# EAGLE board Rotall Encoder ver1.0 (EAGLE 9.6.0)
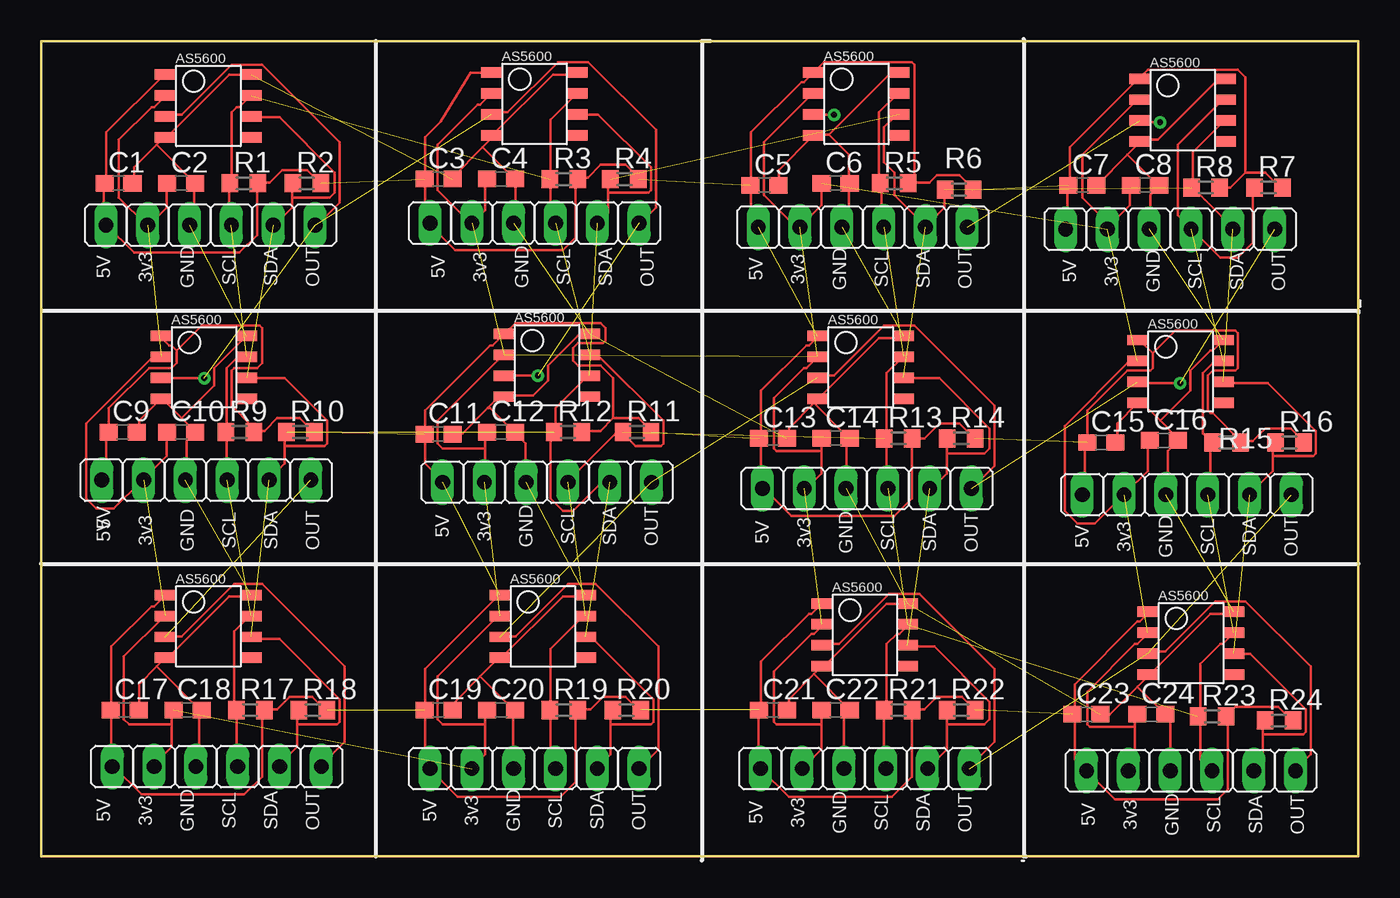
[diagram p0: board, top side]
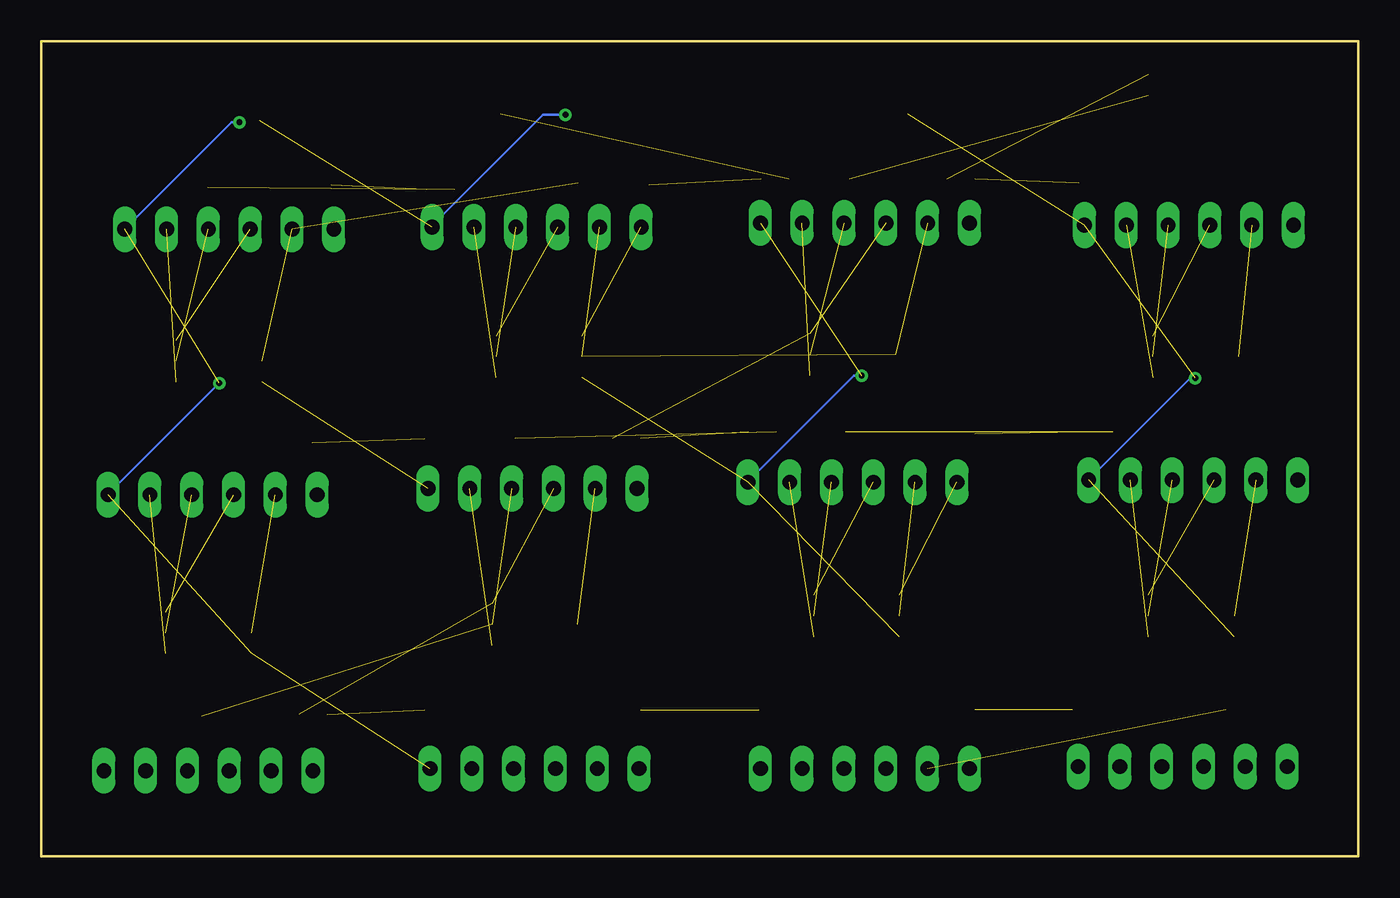
[diagram p1: board, bottom side, seen from below]

Size 80.01 x 49.53 mm. Coordinates in mm from the lower left corner, seen from the top.
Outline: 80.01,0 0,0 0,49.53 80.01,49.53 80.01,0
Copper layers (1*16): Top 0.035mm / dielectric 1.5mm / Bottom 0.035mm
Design rules "default": minimum track width 6mil, minimum drill 0.35mm, track to track 6mil, track to pad 6mil, pad to pad 6mil, via to via 6mil, smd to smd 6mil, copper to edge 40mil, drill to drill 6mil, minimum pad ring 10mil, minimum via ring 8mil, stop-mask expansion 4mil, vias tented up to drill 0mil, thermal gap 10mil
tRestrict: 11 lines
bRestrict: 7 lines
vRestrict: 5 lines

## Footprints (pad centres in the part's own frame; a part is rotated, then mirrored left to right if it is on the bottom)
C0603 = smd 1.1 x 1: 1 -0.85,0; 2 0.85,0
06X01 = drill 0.9 long: 1 6.35,0; 2 3.81,0; 3 1.27,0; 4 -1.27,0; 5 -3.81,0; 6 -6.35,0
R0603 = smd 1 x 1.1: 1 -0.85,0; 2 0.85,0
AS5600 = smd 1.27 x 0.635: DIR 2.585,1.905; GND -2.615,-1.905; OUT -2.615,-0.635; PGO 2.585,-1.905; SCL 2.585,0.635; SDA 2.585,-0.635; VDD3V3 -2.615,0.635; VDD5V -2.615,1.905

## Placement (x,y rotation side)
C1  [C0603]  4.7,40.89 0 top
C2  [C0603]  8.51,40.89 0 top
C3  [C0603]  24.13,41.15 0 top
C4  [C0603]  27.94,41.15 0 top
C5  [C0603]  43.94,40.77 0 top
C6  [C0603]  48.26,40.89 0 top
C7  [C0603]  63.25,40.77 0 top
C8  [C0603]  67.06,40.77 0 top
C9  [C0603]  4.95,25.78 0 top
C10  [C0603]  8.51,25.78 0 top
C11  [C0603]  24.13,25.65 0 top
C12  [C0603]  27.94,25.78 0 top
C13  [C0603]  44.45,25.4 0 top
C14  [C0603]  48.26,25.4 0 top
C15  [C0603]  64.39,25.15 0 top
C16  [C0603]  68.2,25.27 0 top
C17  [C0603]  5.08,8.89 0 top
C18  [C0603]  8.89,8.89 0 top
C19  [C0603]  24.13,8.89 0 top
C20  [C0603]  27.94,8.89 0 top
C21  [C0603]  44.45,8.89 0 top
C22  [C0603]  48.26,8.89 0 top
C23  [C0603]  63.5,8.64 0 top
C24  [C0603]  67.44,8.64 0 top
JP1  06X01  [06X01]  29.97,38.48 180 top
JP2  06X01  [06X01]  49.91,38.23 180 top
JP3  06X01  [06X01]  10.29,38.35 180 top
JP4  06X01  [06X01]  68.58,38.1 180 top
JP5  06X01  [06X01]  10.03,22.86 180 top
JP6  06X01  [06X01]  30.73,22.73 180 top
JP7  06X01  [06X01]  50.16,22.35 180 top
JP8  06X01  [06X01]  69.6,21.97 180 top
JP9  06X01  [06X01]  10.67,5.46 180 top
JP10  06X01  [06X01]  29.97,5.33 180 top
JP11  06X01  [06X01]  50.04,5.33 180 top
JP12  06X01  [06X01]  69.85,5.21 180 top
R1  [R0603]  12.32,40.89 0 top
R2  [R0603]  16.13,40.89 0 top
R3  [R0603]  31.75,41.15 0 top
R4  [R0603]  35.43,41.15 0 top
R5  [R0603]  51.82,40.89 0 top
R6  [R0603]  55.75,40.51 0 top
R7  [R0603]  74.55,40.64 0 top
R8  [R0603]  70.74,40.64 0 top
R9  [R0603]  12.07,25.78 0 top
R10  [R0603]  15.75,25.78 0 top
R11  [R0603]  36.2,25.78 0 top
R12  [R0603]  32,25.78 0 top
R13  [R0603]  52.07,25.4 0 top
R14  [R0603]  55.88,25.4 0 top
R15  [R0603]  72.01,25.15 0 top
R16  [R0603]  75.82,25.15 0 top
R17  [R0603]  12.7,8.89 0 top
R18  [R0603]  16.51,8.89 0 top
R19  [R0603]  31.75,8.89 0 top
R20  [R0603]  35.56,8.89 0 top
R21  [R0603]  52.07,8.89 0 top
R22  [R0603]  55.88,8.89 0 top
R23  [R0603]  71.12,8.51 0 top
R24  [R0603]  75.18,8.25 0 top
U1  AS5600  [AS5600]  10.16,45.59 0 top
U2  AS5600  [AS5600]  29.97,45.72 0 top
U3  AS5600  [AS5600]  49.53,45.72 0 top
U4  AS5600  [AS5600]  69.34,45.34 0 top
U5  AS5600  [AS5600]  9.91,29.72 0 top
U6  AS5600  [AS5600]  30.73,29.84 0 top
U7  AS5600  [AS5600]  49.78,29.72 0 top
U8  AS5600  [AS5600]  69.22,29.46 0 top
U9  AS5600  [AS5600]  10.16,13.97 0 top
U10  AS5600  [AS5600]  30.48,13.97 0 top
U11  AS5600  [AS5600]  50.04,13.46 0 top
U12  AS5600  [AS5600]  69.85,12.95 0 top

## Library data of the parts
C1-C24 = rcl; SPICEPREFIX: C
JP1-JP12 = PinHeader
R1-R24 = rcl; SPICEPREFIX: R
U1-U12 = AS5600

## Nets
+3V3: C2.1 C4.1 C6.1 C8.1 C10.1 C12.1 C14.1 C16.1 C18.1 C20.1 C22.1 C24.1 JP1.2 JP2.2 JP3.2 JP4.2 JP5.2 JP6.2 JP7.2 JP8.2 JP9.2 JP10.2 JP11.2 JP12.2 U1.VDD3V3 U2.VDD3V3 U3.VDD3V3 U4.VDD3V3 U5.VDD3V3 U6.VDD3V3 U7.VDD3V3 U8.VDD3V3 U9.VDD3V3 U10.VDD3V3 U11.VDD3V3 U12.VDD3V3
+5V: C1.1 C3.1 C5.1 C7.1 C9.1 C11.1 C13.1 C15.1 C17.1 C19.1 C21.1 C23.1 JP1.1 JP2.1 JP3.1 JP4.1 JP5.1 JP6.1 JP7.1 JP8.1 JP9.1 JP10.1 JP11.1 JP12.1 R1.2 R2.2 R3.2 R4.2 R5.2 R6.2 R7.2 R8.2 R9.2 R10.2 R11.2 R12.2 R13.2 R14.2 R15.2 R16.2 R17.2 R18.2 R19.2 R20.2 R21.2 R22.2 R23.2 R24.2 U1.VDD5V U2.VDD5V U3.VDD5V U4.VDD5V U5.VDD5V U6.VDD5V U7.VDD5V U8.VDD5V U9.VDD5V U10.VDD5V U11.VDD5V U12.VDD5V
GND: C1.2 C2.2 C3.2 C4.2 C5.2 C6.2 C7.2 C8.2 C9.2 C10.2 C11.2 C12.2 C13.2 C14.2 C15.2 C16.2 C17.2 C18.2 C19.2 C20.2 C21.2 C22.2 C23.2 C24.2 JP1.3 JP2.3 JP3.3 JP4.3 JP5.3 JP6.3 JP7.3 JP8.3 JP9.3 JP10.3 JP11.3 JP12.3 U1.DIR U1.GND U2.DIR U2.GND U3.DIR U3.GND U4.DIR U4.GND U5.DIR U5.GND U6.DIR U6.GND U7.DIR U7.GND U8.DIR U8.GND U9.DIR U9.GND U10.DIR U10.GND U11.DIR U11.GND U12.DIR U12.GND
OUT: JP1.6 JP2.6 JP3.6 JP4.6 JP5.6 JP6.6 JP7.6 JP8.6 JP9.6 JP10.6 JP11.6 JP12.6 U1.OUT U2.OUT U3.OUT U4.OUT U5.OUT U6.OUT U7.OUT U8.OUT U9.OUT U10.OUT U11.OUT U12.OUT
SCL: JP1.4 JP2.4 JP3.4 JP4.4 JP5.4 JP6.4 JP7.4 JP8.4 JP9.4 JP10.4 JP11.4 JP12.4 R1.1 R3.1 R5.1 R7.1 R9.1 R11.1 R13.1 R15.1 R17.1 R19.1 R21.1 R23.1 U1.SCL U2.SCL U3.SCL U4.SCL U5.SCL U6.SCL U7.SCL U8.SCL U9.SCL U10.SCL U11.SCL U12.SCL
SDA: JP1.5 JP2.5 JP3.5 JP4.5 JP5.5 JP6.5 JP7.5 JP8.5 JP9.5 JP10.5 JP11.5 JP12.5 R2.1 R4.1 R6.1 R8.1 R10.1 R12.1 R14.1 R16.1 R18.1 R20.1 R22.1 R24.1 U1.SDA U2.SDA U3.SDA U4.SDA U5.SDA U6.SDA U7.SDA U8.SDA U9.SDA U10.SDA U11.SDA U12.SDA

## Tracks (layer width: path | path; a pad name or v marks a point on that pad's centre or on a via)
+3V3  (11 unrouted)
  Top 0.152: 26.97,8.03 26.97,6.2 26.21,5.44 JP10.2 | 26.97,8.03 26.97,8.79 C20.1 | 26.97,8.03 24.38,8.03 24.08,8.33 24.08,10.92 27.74,14.58 U10.VDD3V3 | C10.1 7.62,25.7 7.62,24.33 6.25,22.96 JP5.2 6.1,22.81 4.42,21.13 3.35,21.13 2.74,21.74 2.74,26.31 6.71,30.28 7.16,30.28 U5.VDD3V3 | C2.1 7.62,40.79 7.62,39.42 6.55,38.35 JP3.2 6.4,38.35 4.72,40.03 4.72,43.54 6.71,45.52 6.86,45.52 7.47,46.13 U1.VDD3V3 | 7.93,8.03 7.93,6.65 6.86,5.59 JP9.2 | 7.93,8.03 7.93,8.79 C18.1 | 7.93,8.03 5.33,8.03 5.03,8.33 5.03,12.14 7.47,14.58 U9.VDD3V3 | 26.97,24.79 26.97,22.81 JP6.2 | 26.97,24.79 26.97,25.7 C12.1 | 26.97,24.79 24.38,24.79 24.08,25.09 24.08,26.47 28.04,30.43 U6.VDD3V3 | 47.4,8.03 47.4,6.5 JP11.2 | 47.4,8.03 47.4,8.79 C22.1 | 47.4,8.03 44.65,8.03 44.5,8.18 44.5,11.23 46.79,13.51 46.94,13.51 47.4,13.97 U11.VDD3V3 | C4.1 26.97,41.1 26.97,39.27 26.21,38.51 JP1.2 26.06,38.51 24.08,40.49 24.08,43.23 26.52,45.67 26.67,45.67 27.28,46.28 U2.VDD3V3 | 66.45,7.87 66.45,5.59 66.14,5.28 JP12.2 | 66.45,7.87 66.45,8.64 C24.1 | 66.45,7.87 63.7,7.87 63.55,8.03 63.55,10.01 66.45,12.9 66.6,12.9 67.21,13.51 U12.VDD3V3 | 47.4,24.64 47.4,23.27 46.48,22.35 JP7.2 | 47.4,24.64 47.4,25.4 C14.1 | 47.4,24.64 44.65,24.64 44.5,24.79 44.5,27.84 46.33,29.67 46.48,29.67 47.09,30.28 U7.VDD3V3 | C6.1 47.4,40.79 47.4,39.57 46.18,38.35 JP2.2 46.03,38.35 45.72,38.35 43.89,40.18 43.89,43.38 46.79,46.28 U3.VDD3V3 | C16.1 67.21,25.25 67.21,23.42 65.84,22.05 JP8.2 65.68,21.89 64.01,20.22 62.94,20.22 62.18,20.98 62.18,26.16 65.99,29.97 66.6,29.97 U8.VDD3V3 | 64.92,38.35 64.77,38.2 JP4.2 64.92,38.35 | 64.92,38.35 66.14,39.57 66.14,40.64 C8.1
  Top 0.152: 64.92,38.35 63.25,40.03 63.25,42.62 66.6,45.97 U4.VDD3V3
+5V  (11 unrouted)
  Top 0.152: R20.2 36.27,8.94 35.51,9.7 34.14,9.7 33.38,8.94 32.61,8.94 R19.2 32.46,8.79 32.46,4.52 31.55,3.61 25.3,3.61 23.62,5.28 JP10.1 23.62,5.44 23.32,5.74 23.32,8.79 C19.1 23.32,8.94 23.32,11.38 27.74,15.8 U10.VDD5V | R10.2 16.46,25.86 15.7,26.62 14.33,26.62 13.56,25.86 12.95,25.86 R9.2 12.8,25.86 12.8,26.16 11.58,27.38 11.58,29.51 11.73,29.67 13.11,29.67 13.41,29.97 13.41,32.11 13.26,32.26 9.75,32.26 8.23,30.73 | JP5.1 3.81,22.96 3.96,23.11 3.96,25.7 C9.1 4.12,25.86 4.12,27.23 6.55,29.67 7.93,29.67 8.23,29.97 8.23,30.73 | 8.23,30.73 7.93,31.04 7.77,31.04 7.31,31.5 U5.VDD5V | R2.2 16.92,40.95 16.15,41.71 14.63,41.71 13.87,40.95 13.26,40.95 R1.2 13.11,40.79 13.11,37.74 12.04,36.68 5.64,36.68 3.96,38.35 JP3.1 3.81,38.35 3.81,40.79 C1.1 3.96,40.95 3.96,43.99 7.47,47.5 U1.VDD5V | 34.75,26.62 33.98,25.86 32.92,25.86 R12.2 | 34.75,26.62 36.27,26.62 37.03,25.86 R11.2 | JP6.1 24.38,22.81 23.32,23.88 23.32,25.55 C11.1 23.32,25.7 23.32,27.08 27.28,31.04 27.43,31.04 28.04,31.65 U6.VDD5V 28.19,31.8 28.8,32.41 33.98,32.41 34.29,32.11 34.29,31.34 34.14,31.19 32.61,31.19 32.31,30.89 32.31,30.12 32.61,29.82 33.98,29.82 34.75,29.06 34.75,26.62 | R22.2 56.69,8.94 55.93,9.7 54.41,9.7 53.65,8.94 53.04,8.94 R21.2 52.88,8.79 52.88,4.83 51.66,3.61 45.41,3.61 JP11.1 43.59,5.44 43.59,8.79 C21.1 43.74,8.94 43.74,11.84 46.63,14.73 46.79,14.73 47.4,15.34 U11.VDD5V | R18.2 17.22,8.94 16.46,9.7 15.09,9.7 14.33,8.94 13.56,8.94 R17.2 13.41,8.79 13.41,4.83 12.34,3.76 6.1,3.76 4.42,5.44 JP9.1 4.27,5.59 4.27,8.79 C17.1 4.27,8.94 4.27,12.75 6.71,15.19 6.86,15.19 7.47,15.8 U9.VDD5V
  Top 0.152: R4.2 36.27,41.25 35.51,42.01 33.98,42.01 33.22,41.25 32.61,41.25 R3.2 32.46,41.1 32.46,37.59 31.7,36.83 25.15,36.83 23.62,38.35 JP1.1 23.62,38.51 23.32,38.81 23.32,41.1 C3.1 23.32,41.25 23.32,43.69 24.27,44.64 26.09,47.62 U2.VDD5V | R24.2 75.89,8.33 75.13,9.09 72.54,9.09 72.09,8.64 R23.2 72.09,8.48 72.09,4.06 71.48,3.45 65.23,3.45 63.55,5.13 JP12.1 63.4,5.28 62.79,5.89 62.79,8.64 | 62.79,8.64 62.79,10.46 66.6,14.27 66.75,14.27 67.21,14.73 U12.VDD5V | 62.79,8.64 C23.1 | R14.2 56.69,25.4 55.78,26.31 54.56,26.31 53.65,25.4 R13.2 52.88,25.4 52.88,21.74 51.82,20.68 45.57,20.68 43.89,22.35 JP7.1 43.74,22.35 43.74,25.4 | 43.74,25.4 43.74,28.3 46.48,31.04 46.63,31.04 47.09,31.5 U7.VDD5V | 43.74,25.4 C13.1 | 53.04,40.95 53.95,40.95 54.41,41.4 55.78,41.4 56.54,40.64 R6.2 | 53.04,40.95 52.73,40.95 R5.2 53.04,40.95 | JP2.1 43.13,38.66 43.13,40.64 C5.1 43.13,40.79 43.13,43.99 46.18,47.04 46.33,47.04 46.79,47.5 U3.VDD5V 46.94,47.65 47.55,48.26 52.88,48.26 53.04,48.11 53.04,40.95 | R16.2 76.66,25.25 75.89,26.01 74.37,26.01 73.61,25.25 73,25.25 R15.2 72.85,25.25 71.17,26.92 71.02,26.92 70.87,27.08 70.87,29.21 71.17,29.51 72.54,29.51 72.7,29.67 72.7,31.8 72.54,31.95 68.89,31.95 67.51,30.58 | JP8.1 63.25,22.05 63.4,22.2 63.4,25.09 C15.1 63.55,25.25 63.55,27.08 65.99,29.51 67.36,29.51 67.51,29.67 67.51,30.58 | 67.51,30.58 66.75,31.34 U8.VDD5V | R8.2 72.24,40.64 73.15,41.55 | 73.15,41.55 74.37,41.55 75.29,40.64 R7.2 | JP4.1 62.33,38.2 62.33,40.64 C7.1 62.48,40.79 62.48,43.08 66.6,47.19 U4.VDD5V 66.75,47.35 67.21,47.8 72.7,47.8 73.15,47.35 73.15,41.55
GND  (11 unrouted)
  Top 0.152: JP2.3 49.07,38.66 49.07,40.79 C6.2 49.07,40.95 49.07,42.62 47.85,43.84 | C5.2 44.81,40.79 44.81,41.71 46.79,43.69 U3.GND 46.94,43.84 47.85,43.84 | 47.85,43.84 51.51,47.5 51.97,47.5 U3.DIR | JP3.3 9.14,38.35 9.3,38.51 9.3,40.79 C2.2 9.3,40.95 7.01,43.23 | 7.01,43.23 7.47,43.69 U1.GND 7.62,43.69 11.43,47.5 U1.DIR | 7.01,43.23 5.64,41.86 5.64,40.95 C1.2 | JP1.3 28.8,38.51 28.8,41.1 C4.2 28.65,41.25 26.82,43.08 | 26.82,43.08 27.43,43.69 U2.GND 27.43,43.84 31.09,47.5 32.46,47.5 U2.DIR | 26.82,43.08 24.99,41.25 C3.2 | JP9.3 9.45,5.59 9.6,5.74 9.6,8.79 C18.2 9.6,8.94 7.01,11.53 | 7.01,11.53 7.47,11.99 U9.GND 7.62,11.99 11.43,15.8 12.65,15.8 U9.DIR | 7.01,11.53 5.94,10.46 5.94,8.94 C17.2 | 26.67,10.92 27.74,11.99 U10.GND 27.89,11.99 31.7,15.8 32.92,15.8 U10.DIR | 26.67,10.92 24.99,9.25 24.99,8.94 C19.2 | 26.67,10.92 28.65,8.94 C20.2 28.65,8.79 28.65,5.44 JP10.3 | C9.2 5.94,25.86 5.94,26.47 7.16,27.69 U5.GND 7.31,27.84 8.53,26.62 | 8.53,26.62 9.3,25.86 C10.2 9.3,25.7 8.84,25.25 8.84,22.96 JP5.3 | 8.53,26.62 10.52,28.6 10.52,29.67 12.34,31.5 U5.DIR | 46.94,11.07 47.4,11.53 U11.GND 47.55,11.53 51.36,15.34 52.58,15.34 U11.DIR | 46.94,11.07 45.41,9.55 45.41,8.94 C21.2 | 46.94,11.07 49.07,8.94 C22.2 49.07,8.79 48.77,8.48 JP11.3 | 27.13,27.23 27.74,27.84 28.04,27.84 U6.GND 28.19,27.99 29.87,27.99 30.79,28.9 30.79,29.82 32.61,31.65 33.22,31.65 U6.DIR | 27.13,27.23 25.6,25.7 24.99,25.7 C11.2 | 27.13,27.23 27.28,27.23 28.65,25.86 C12.2 28.8,25.7 29.41,25.09 29.41,22.81 JP6.3 | 46.94,27.53 47.09,27.69 U7.GND | 46.94,27.53 45.41,26.01 45.41,25.4 C13.2 | 46.94,27.53 48.92,25.55
  Top 0.152: 48.92,25.55 49.07,25.4 C14.2 48.92,25.55 | 46.94,27.53 U7.GND | U7.DIR 52.27,31.5 50.9,31.5 47.24,27.84 U7.GND | 48.92,25.55 48.92,22.35 JP7.3 | C23.2 64.92,8.64 66.6,10.31 | 66.6,10.31 67.21,10.92 U12.GND 67.36,11.07 71.02,14.73 72.39,14.73 U12.DIR | 66.6,10.31 68.28,8.64 C24.2 68.43,8.64 68.58,8.48 JP12.3 | C15.2 65.38,25.25 65.38,26.31 66.6,27.53 U8.GND 66.75,27.69 67.97,26.47 | 67.97,26.47 69.04,25.4 C16.2 69.04,25.25 68.43,24.64 68.43,22.05 JP8.3 | 67.97,26.47 69.8,28.3 69.8,29.51 71.02,30.73 71.17,30.73 71.78,31.34 U8.DIR | 65.99,42.62 66.75,43.38 U4.GND 66.75,43.54 67.82,43.54 71.48,47.19 71.78,47.19 U4.DIR | 65.99,42.62 64.16,40.79 C7.2 | 65.99,42.62 67.82,40.79 C8.2 67.82,40.64 67.36,40.18 67.36,38.2 JP4.3
OUT  (via drill 0.35)  (11 unrouted)
  Top 0.152: JP10.6 37.49,6.5 37.49,12.75 33.68,16.56 32,16.56 28.8,13.36 27.89,13.36 U10.OUT | v9.91,29.06 7.31,29.06 U5.OUT | U1.OUT 7.62,45.06 8.53,45.06 11.58,48.11 13.41,48.11 18.14,43.38 18.14,39.73 16.76,38.35 JP3.6 | v30.17,29.21 U6.OUT | U11.OUT 47.55,12.9 48.46,12.9 51.51,15.95 53.34,15.95 57.91,11.38 57.91,6.96 56.39,5.44 JP11.6 | U9.OUT 7.62,13.36 8.53,13.36 11.73,16.56 13.41,16.56 18.44,11.53 18.44,6.96 17.07,5.59 JP9.6 | U2.OUT 27.43,45.21 28.35,45.21 31.39,48.26 33.22,48.26 37.34,44.14 37.34,39.42 36.42,38.51 JP1.6 | U7.OUT 47.24,29.21 48.16,29.21 51.21,32.26 53.04,32.26 57.91,27.38 57.91,23.72 56.54,22.35 JP7.6 | U12.OUT 67.36,12.45 68.28,12.45 71.32,15.49 73.15,15.49 77.11,11.53 77.11,6.2 76.2,5.28 JP12.6 | v48.16,45.06 46.94,45.06 U3.OUT | v69.19,28.75 66.75,28.75 U8.OUT | v67.97,44.6 66.75,44.6 U4.OUT
  Bottom 0.152: v9.91,29.06 10.21,29.06 16.31,22.96 JP5.6 | v30.17,29.21 30.63,29.21 37.03,22.81 JP6.6 | v48.16,45.06 49.53,45.06 56.24,38.35 JP2.6 | v69.19,28.75 75.89,22.05 JP8.6 | v67.97,44.6 68.43,44.6 JP4.6
SCL  (11 unrouted)
  Top 0.152: JP5.4 11.28,22.96 11.28,25.7 R9.1 11.28,25.86 11.28,29.67 11.89,30.28 12.34,30.28 U5.SCL | JP10.4 31.24,5.44 30.94,5.74 30.94,8.79 R19.1 30.94,8.94 30.94,12.6 32.92,14.58 U10.SCL | JP9.4 11.89,5.59 11.89,8.79 R17.1 11.73,8.94 11.73,13.66 12.65,14.58 U9.SCL | JP3.4 11.43,38.35 11.43,40.79 R1.1 11.58,40.95 11.58,45.21 11.89,45.52 12.04,45.52 12.65,46.13 U1.SCL | JP6.4 32,22.81 34.9,25.7 35.2,25.7 R11.1 35.36,25.7 36.12,24.94 37.64,24.94 37.8,25.09 37.8,26.47 33.83,30.43 33.38,30.43 U6.SCL | JP11.4 51.21,5.44 51.21,8.79 R21.1 51.36,8.94 51.36,12.9 51.97,13.51 52.12,13.51 52.58,13.97 U11.SCL | JP1.4 31.24,38.51 30.94,38.81 30.94,41.1 R3.1 30.94,41.25 30.94,44.75 32.46,46.28 U2.SCL | 51.36,25.4 51.36,22.35 JP7.4 | 51.36,25.4 51.36,29.36 52.27,30.28 U7.SCL | 51.36,25.4 R13.1 | JP12.4 71.02,5.28 70.41,5.89 70.41,8.48 R23.1 70.41,8.64 70.41,11.68 71.63,12.9 71.78,12.9 72.39,13.51 U12.SCL | JP2.4 51.05,38.35 51.05,40.79 R5.1 50.9,40.95 50.9,45.21 51.97,46.28 U3.SCL | JP8.4 70.87,22.05 71.02,22.2 71.02,25.09 R15.1 71.02,25.25 70.56,25.7 70.56,29.36 71.17,29.97 71.78,29.97 U8.SCL | R7.1 73.61,40.64 73.61,37.29 72.7,36.37 71.63,36.37 69.95,38.05 JP4.4 69.8,38.2 69.04,38.96 69.04,43.23 71.78,45.97 U4.SCL
SDA  (11 unrouted)
  Top 0.152: 14.78,24.94 14.78,23.88 13.87,22.96 JP5.5 | 14.78,24.94 14.78,25.7 R10.1 | 14.78,24.94 17.22,24.94 17.37,25.09 17.37,26.47 14.78,29.06 12.5,29.06 U5.SDA | 34.59,8.03 34.59,6.2 33.83,5.44 JP10.5 | 34.59,8.03 34.59,8.79 R20.1 | 34.59,8.03 37.03,8.03 37.19,8.18 37.19,9.55 33.53,13.21 33.07,13.21 U10.SDA | 15.54,8.03 15.54,6.65 14.48,5.59 JP9.5 | 15.54,8.03 15.54,8.79 R18.1 | 15.54,8.03 17.98,8.03 18.14,8.18 18.14,9.55 14.48,13.21 12.8,13.21 U9.SDA | 15.24,40.03 15.24,39.42 14.17,38.35 JP3.5 | 15.24,40.03 15.24,40.79 R2.1 | 15.24,40.03 17.53,40.03 17.83,40.34 17.83,41.55 14.48,44.91 12.8,44.91 U1.SDA | 55.02,8.03 55.02,6.5 JP11.5 | 55.02,8.03 55.02,8.79 R22.1 | 55.02,8.03 57.3,8.03 57.61,8.33 57.61,9.4 54.25,12.75 52.73,12.75 U11.SDA | 34.44,40.34 34.44,39.12 33.83,38.51 JP1.5 | 34.44,40.34 34.44,41.1 R4.1 | 34.44,40.34 36.88,40.34 37.03,40.49 37.03,41.86 33.83,45.06 32.61,45.06 U2.SDA | 55.02,24.49 55.02,23.27 54.1,22.35 JP7.5 | 55.02,24.49 55.02,25.4 R14.1 | 55.02,24.49 57.3,24.49 57.61,24.79 57.61,26.01 54.56,29.06 52.43,29.06 U7.SDA | 74.22,7.42 74.22,5.74 73.76,5.28 JP12.5 | 74.22,7.42 74.22,8.18 R24.1 | 74.22,7.42 76.66,7.42 76.81,7.57 76.81,8.94 73.46,12.29 72.54,12.29 U12.SDA | R6.1 54.86,40.49 54.86,39.42 53.8,38.35 JP2.5 53.65,38.35 51.82,40.18 51.82,41.55 51.21,42.16 51.21,44.3 51.97,45.06 U3.SDA | 74.83,24.33 74.83,23.42 73.46,22.05 JP8.5 | 74.83,24.33 74.83,25.09 R16.1 | 74.83,24.33 77.27,24.33 77.42,24.49 77.42,25.86 74.52,28.75 71.93,28.75 U8.SDA | 69.95,40.64 72.39,38.2 JP4.5 | 69.95,40.64 69.95,42.77 71.78,44.6 U4.SDA | 69.95,40.64 R8.1 | U6.SDA 33.22,29.21 31.24,27.23 31.24,25.86 R12.1 31.09,25.7 30.94,25.55 30.94,21.74 31.7,20.98 32.31,20.98 33.98,22.66 34.44,22.66 JP6.5

## Text on the board
tPlace: 5V | 3v3 | GND | SCL | SDA | OUT | 5V | 3v3 | GND | SCL | SDA | OUT | 5V | 3v3 | GND | SCL | SDA | OUT | 5V | 3v3 | GND | SCL | SDA | OUT | 5V | 5V | 3v3 | GND | SCL | SDA | OUT | 5V | 3v3 | GND | SCL | SDA | OUT | 5V | 3v3 | GND | SCL | SDA | OUT | 5V | 3v3 | GND | SCL | SDA | OUT | 5V | 3v3 | GND | SCL | SDA | OUT | 5V | 3v3 | GND | SCL | SDA | OUT | 5V | 3v3 | GND | SCL | SDA | OUT | 5V | 3v3 | GND | SCL | SDA | OUT